# Altium PCB pogo_socket_6port.PcbDoc
Units mil, origin at the board's own origin, x right, y up, seen from the top; angles counter-clockwise.
Board outline 1442 x 1166 mil, 4 copper layers (Top Layer, Mid-Layer 1, Mid-Layer 2, Bottom Layer), stack 43.512 mil thick; 6 components, 7 nets, 49 pads, 342 vias.
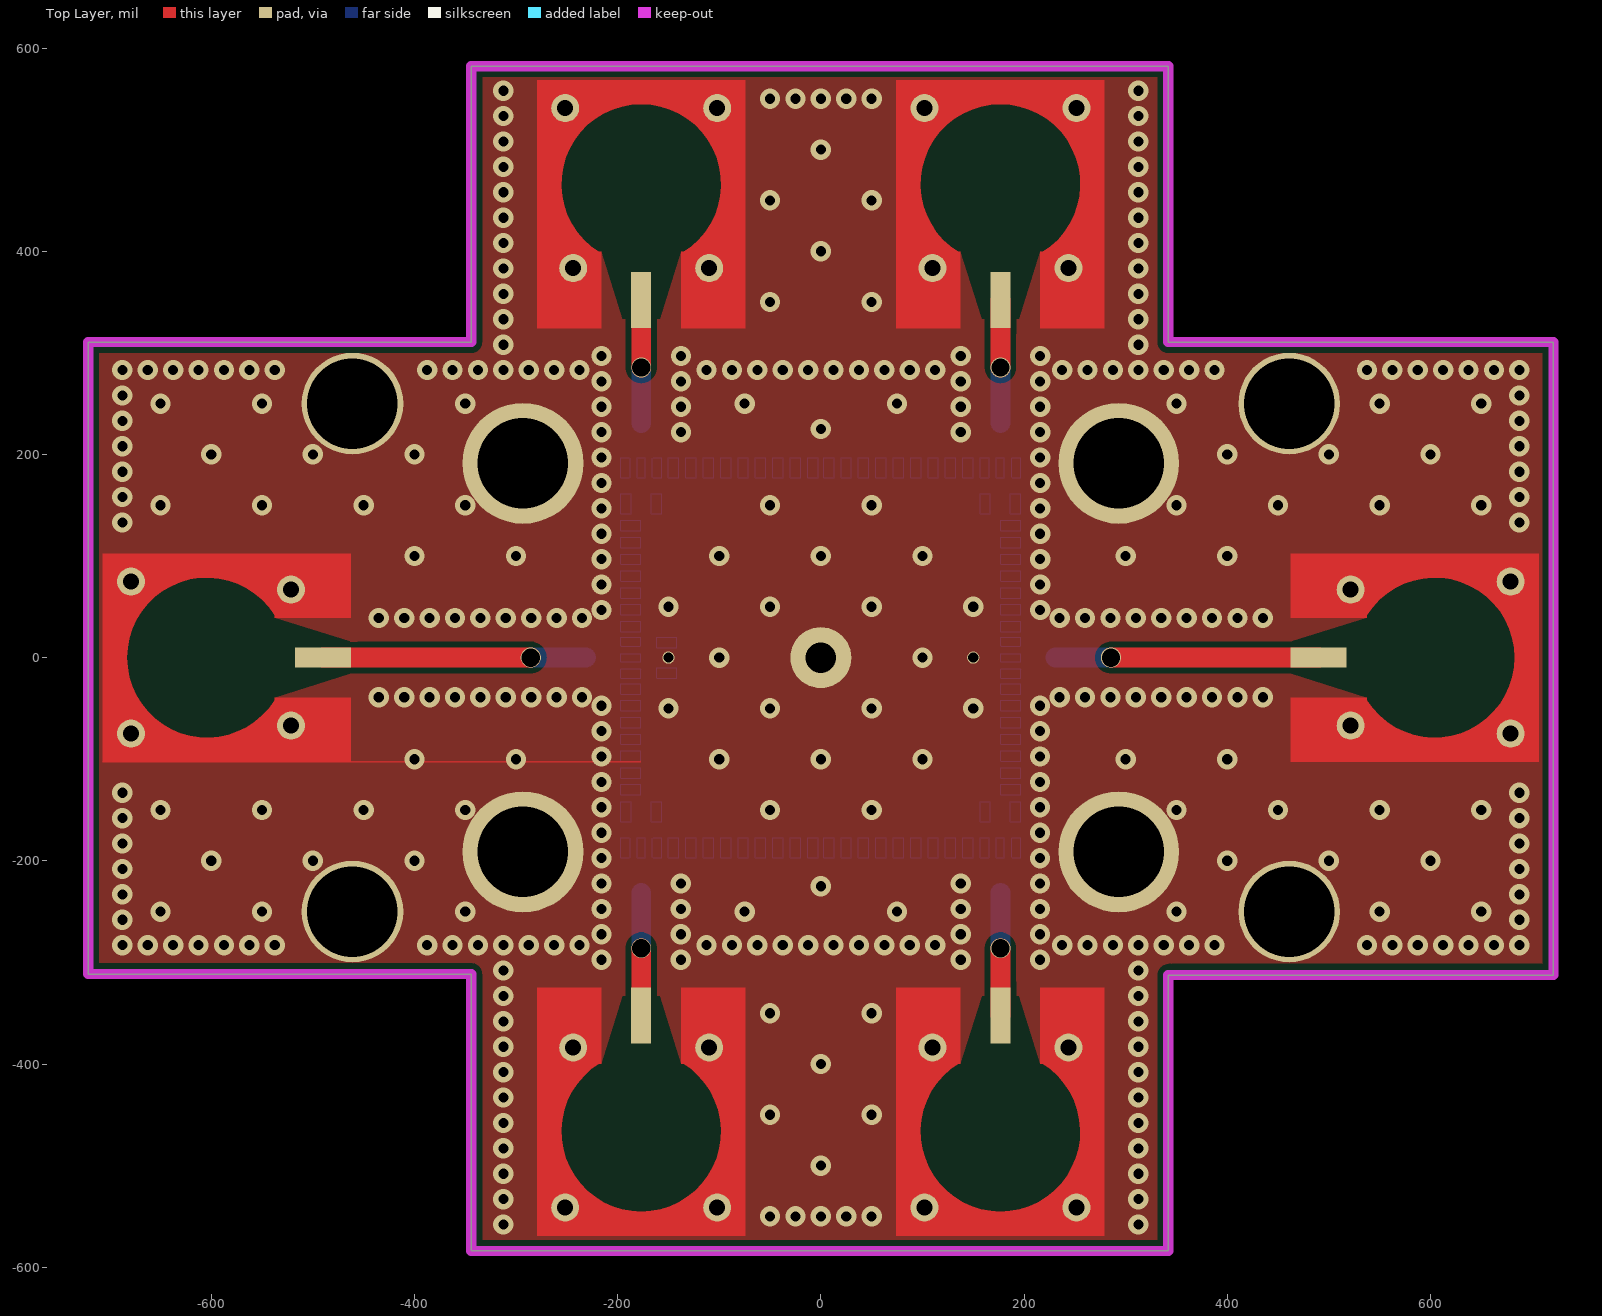
[diagram p0: Top Layer view]
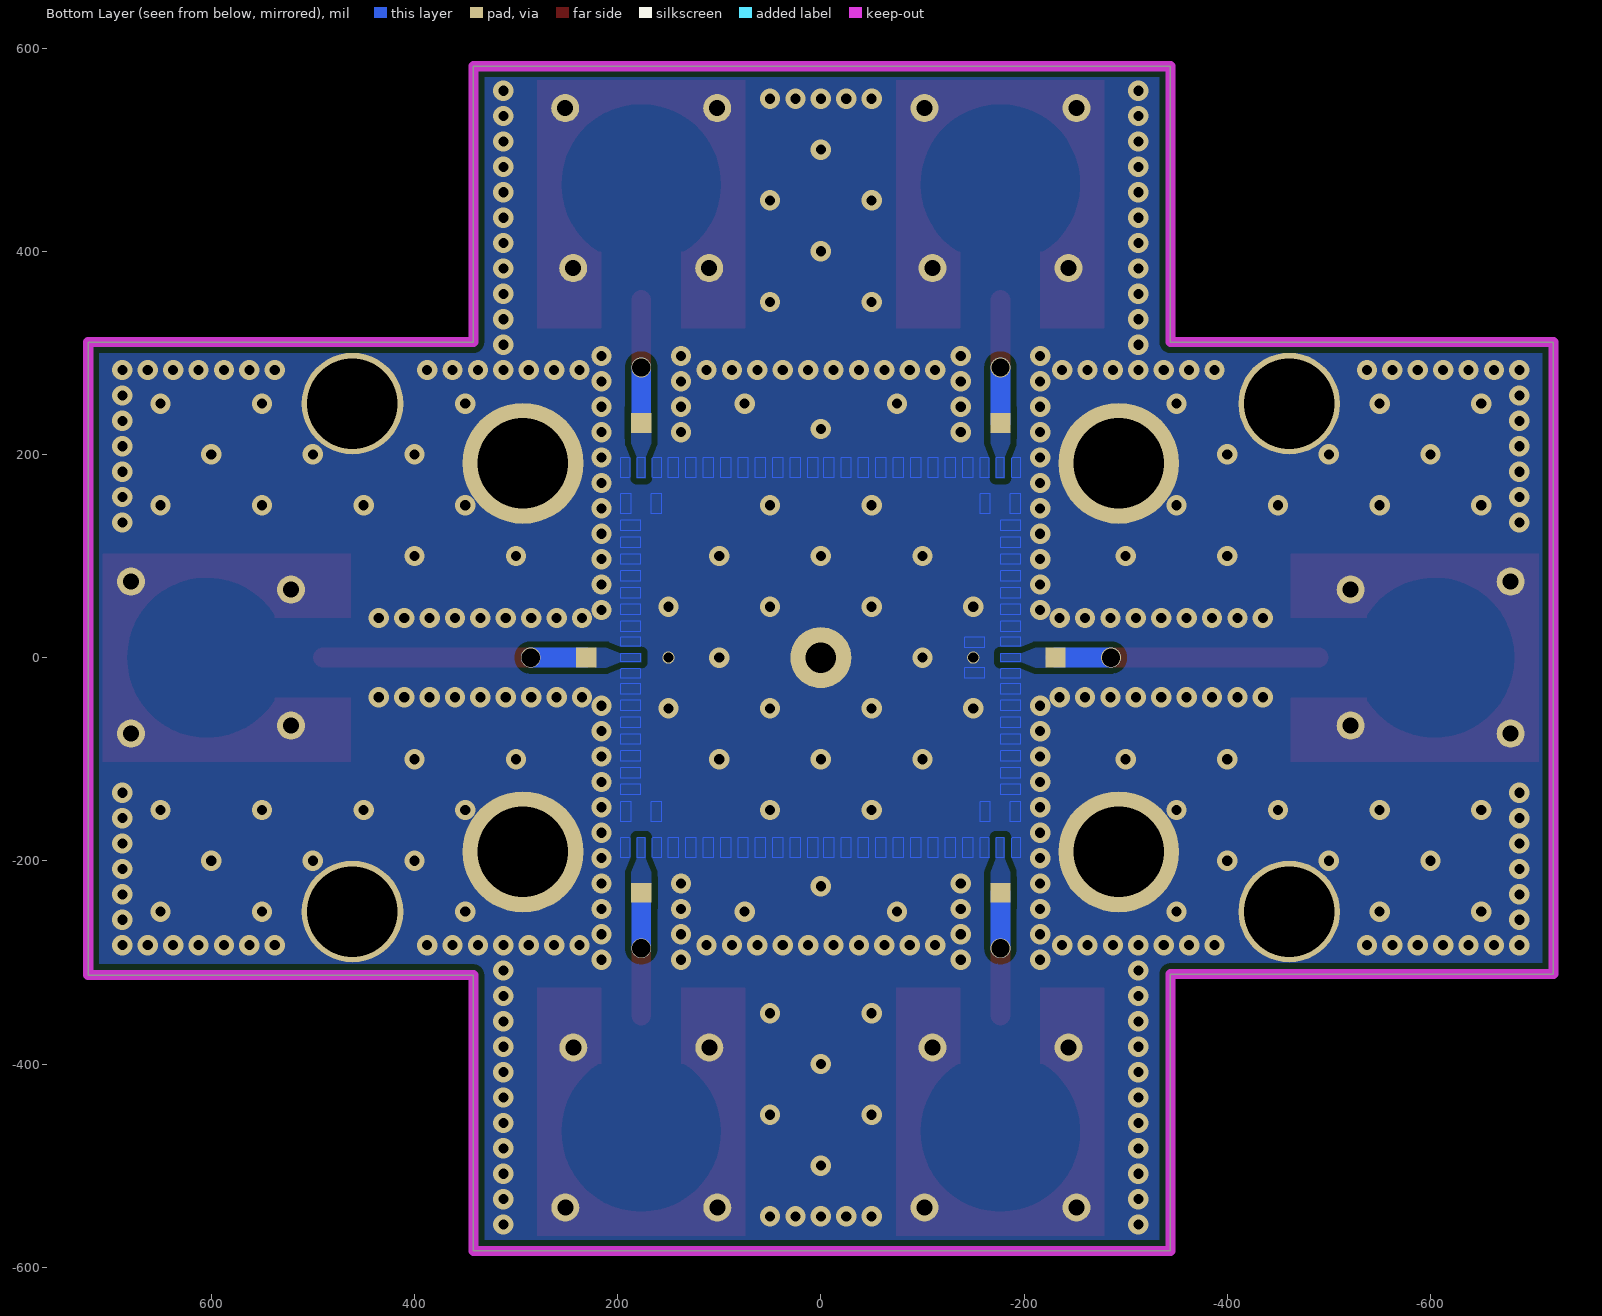
[diagram p1: Bottom Layer view, seen from below]
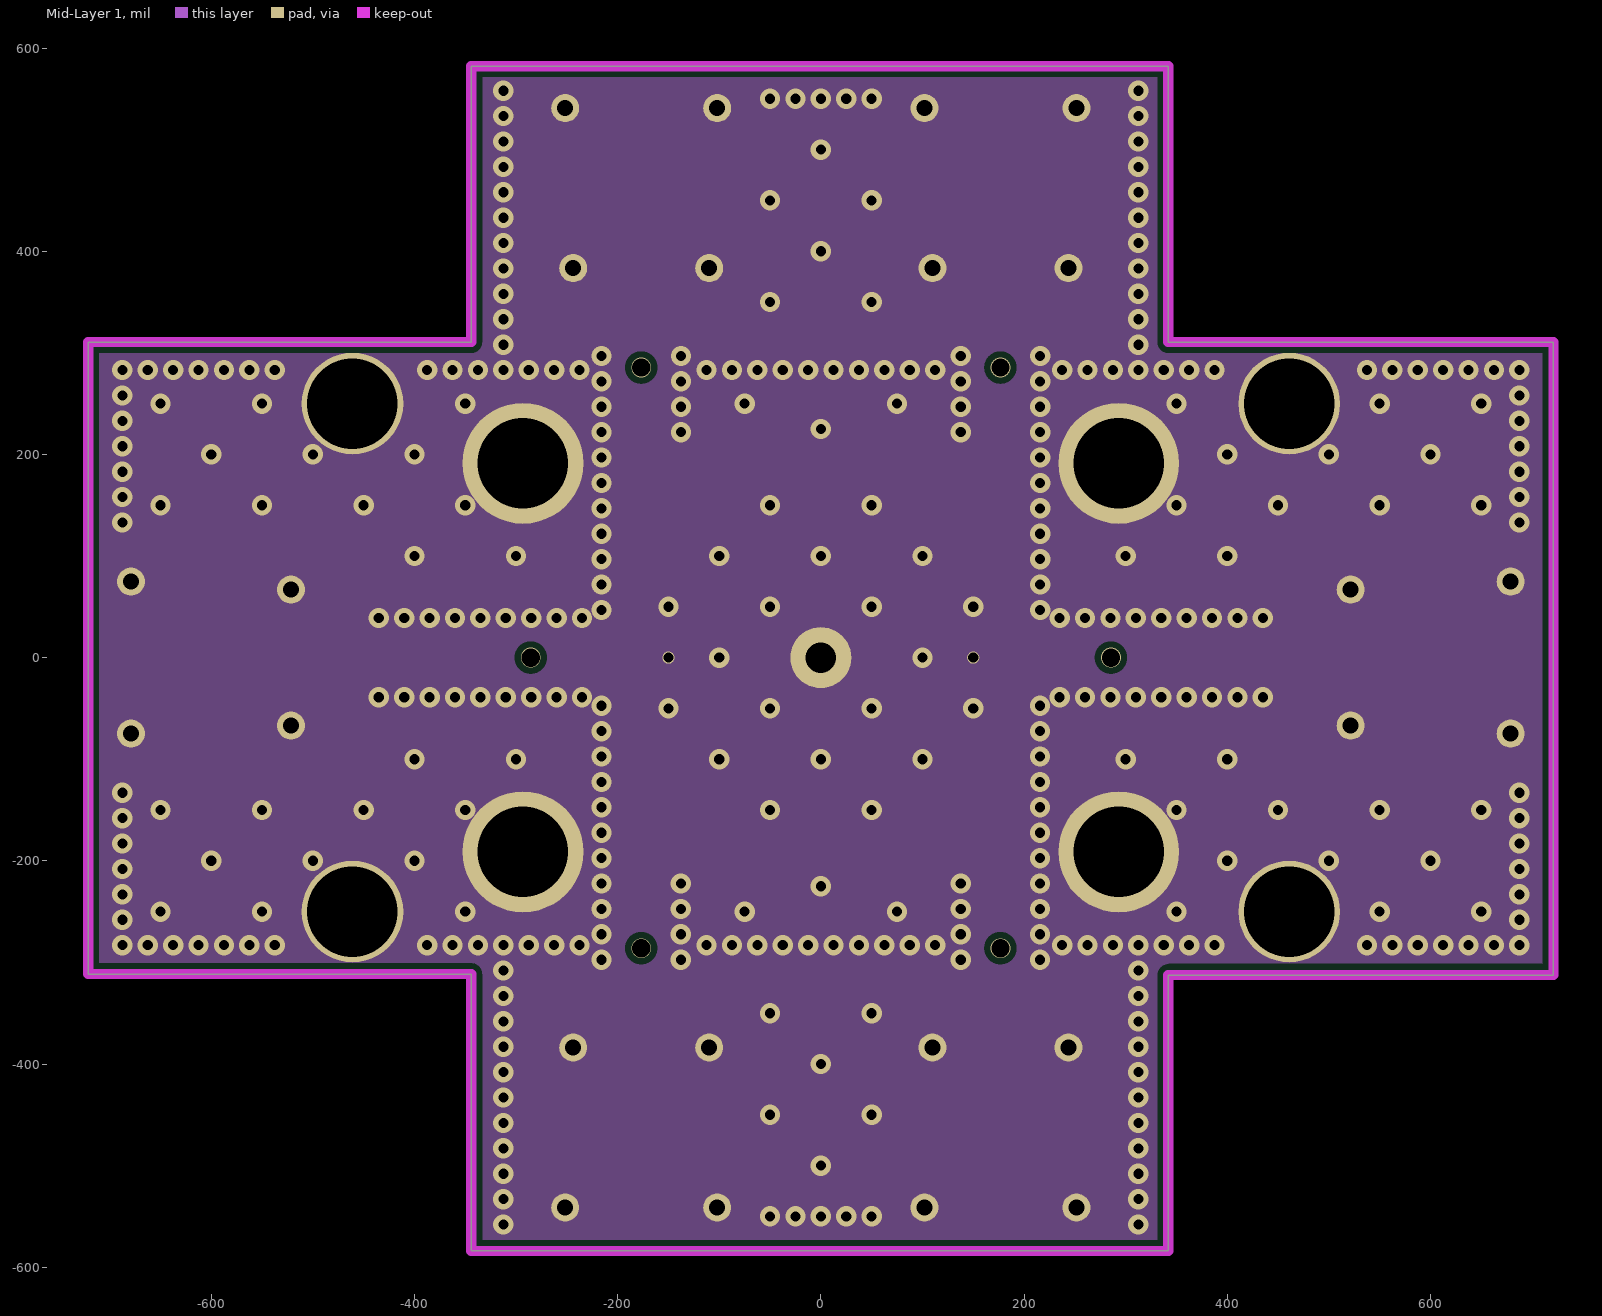
[diagram p2: Mid-Layer 1]
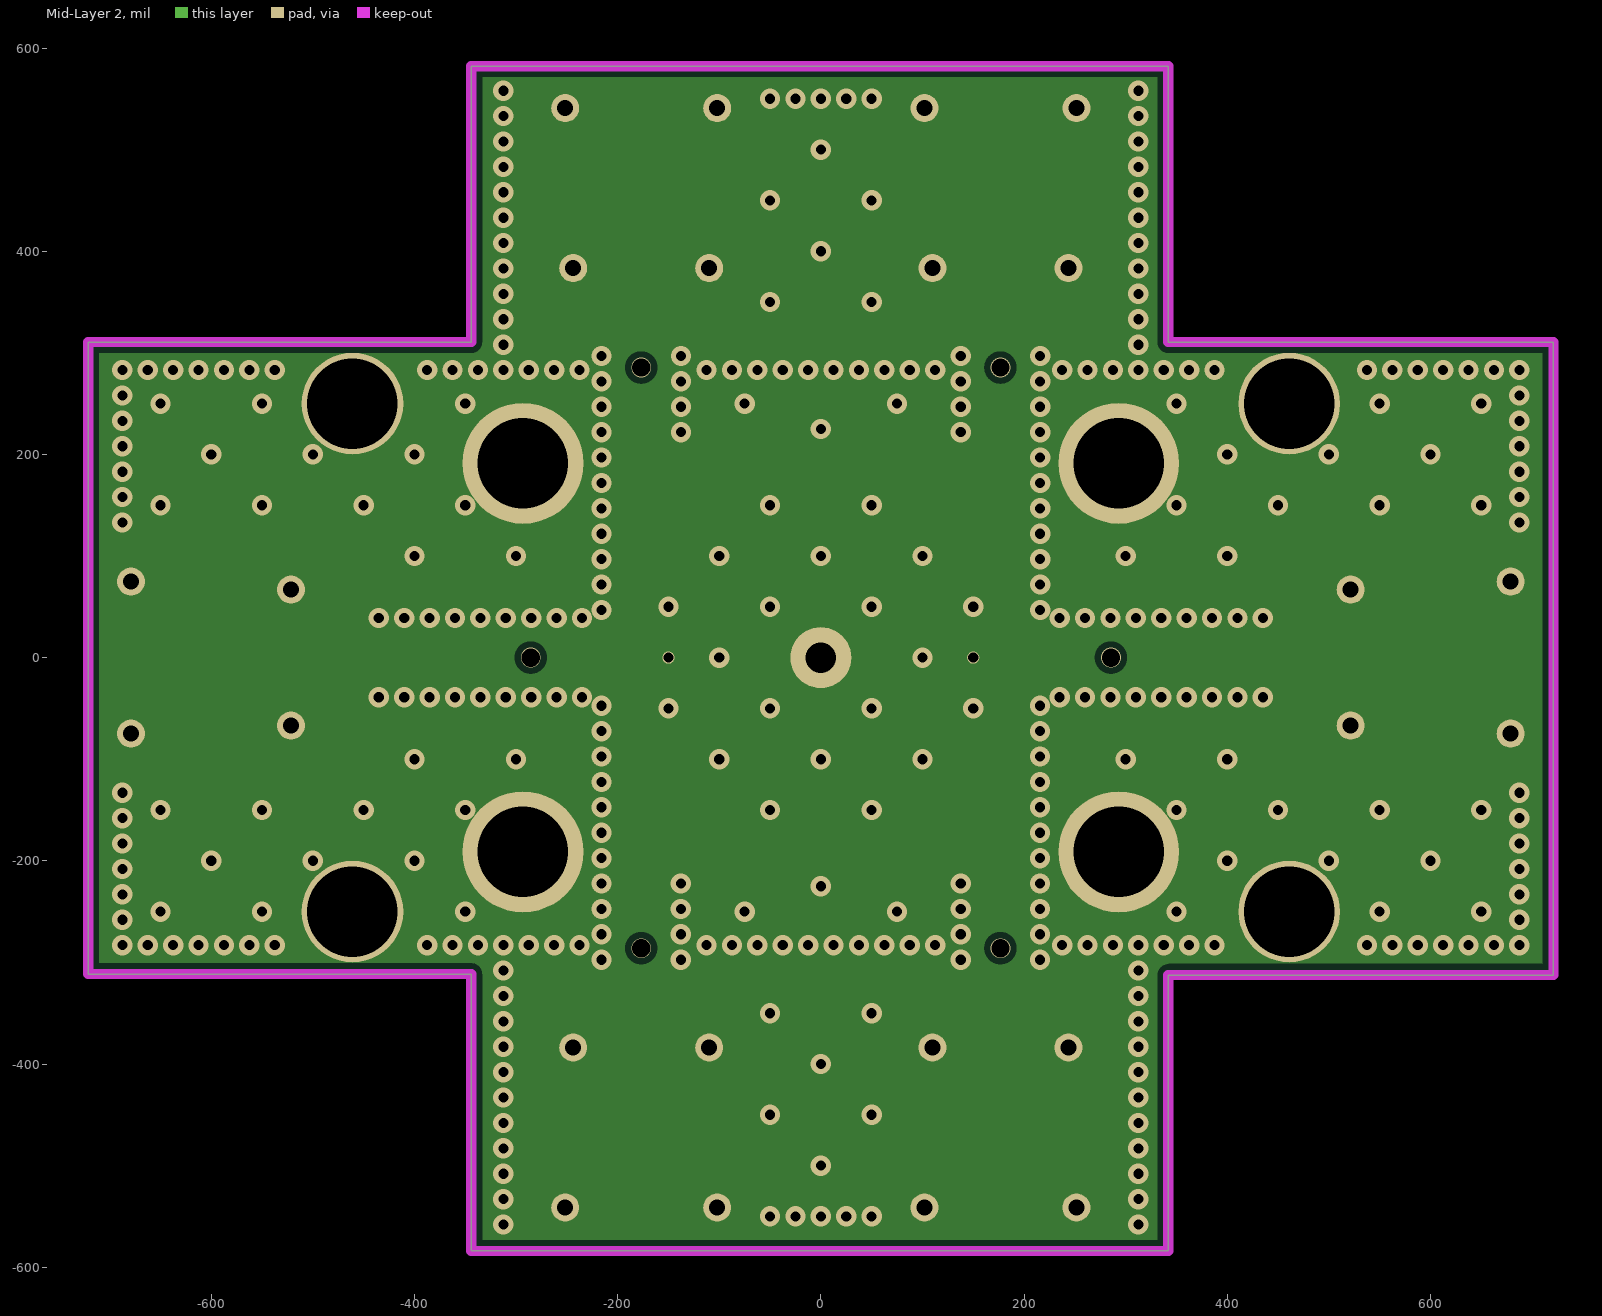
[diagram p3: Mid-Layer 2]
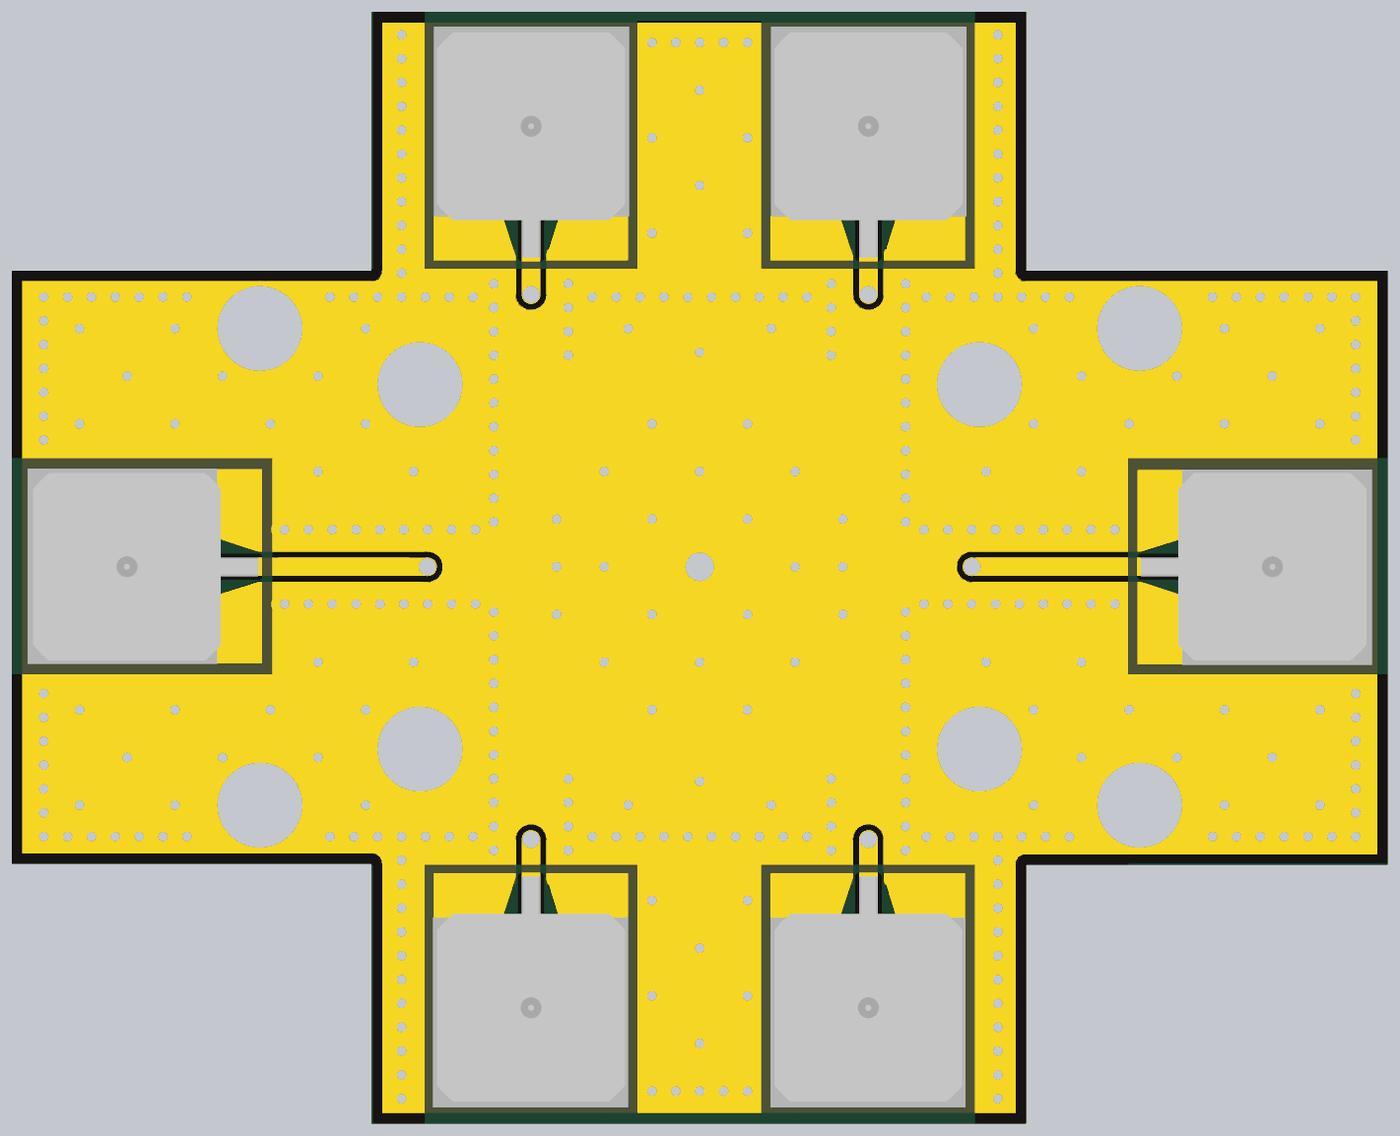
[diagram p4: 3D render of the assembled board from above, using the file's embedded part models]

## Layer stack, top to bottom
Top Solder: solder mask 1, SM-001, Dk 4
Top Layer: signal copper 1.378
Core1: dielectric 10, RO4350B, Dk 3.48
Mid-Layer 1: signal copper 1.378
Dielectric 1: prepreg 7, Composite dielectric, Dk 4.24
Dielectric 2: prepreg 4, Composite dielectric, Dk 4.24
Dielectric 3: prepreg 7, Composite dielectric, Dk 4.24
Mid-Layer 2: signal copper 1.378
Core2: dielectric 10, RO-4350B, Dk 3.48
Bottom Layer: signal copper 1.378
Bottom Solder: solder mask 1, SM-001, Dk 4

## Board outline
-721,-311.5 -721,309.12 -721,310.5 -344,310.5 -344,582 342,582 342,310.5 721,310.5 721,-312.5 342,-312.5 342,-584 -344,-584 -344,-311.5

## Design rules (kind name [scope] priority, off if disabled: settings)
Clearance "Stitching GND" [IsStitchingVia and InNet('GND') vs (IsVia and (Not IsStitchingVia)) Or IsPad] p1: gap=5 ignorepadtopadclearanceinfootprint=FALSE
Clearance Clearance_1 [All] p2: gap=10 ignorepadtopadclearanceinfootprint=FALSE except(0: Poly-Region; 3.74: Track-Region SMDPad-Region Region-Region; 3.94: Track-Track Track-SMDPad; 4: Track-Fill; 5: Track-THPad; 6: Arc-Poly Track-Poly SMDPad-Poly THPad-Poly Via-Poly Fill-Poly Poly-Poly Poly-Text Poly-Hole; 8: Arc-SMDPad; 9: SMDPad-SMDPad)
PolygonConnect [All] p1: connectstyle=Direct reliefconductorwidth=10 reliefentries=4 polygonreliefangle="90 Angle" airgapwidth=10
RoutingVias [All] p1: holewidth=15 width=25 viastyle="Through Hole" minholewidth=5 minwidth=10 maxholewidth=28 maxwidth=50
SolderMaskExpansion [All] p1: expansion=4 istentingtop=FALSE
Width [All] p1 off: maxlimit=21.65 minlimit=3.94 preferedwidth=10 toplayer_prefwidth=3.94 midlayer1_minwidth=10 midlayer1_maxwidth=10 midlayer2_minwidth=10 midlayer2_maxwidth=10 bottomlayer_minwidth=10 bottomlayer_maxwidth=10 minimp=50.000000 maximp=50.000000 favimp=50.000000
Width cpw-Z-1 [All] p2 off: maxlimit=19.68 minlimit=6.87 preferedwidth=10 toplayer_minwidth=12.7 toplayer_prefwidth=15.98 impedanceprofiledriven=TRUE impedanceprofileid={FF6547F1-1ACB-4B88-A69B-03F59FE56022} impedanceprofilevalue=50.000000 minimp=50.000000 maximp=50.000000 favimp=50.000000
30 further rules are at their usual default settings.

## Components (designator, comment, footprint, x,y, rotation, side; value= is the part's Value field where it differs from the comment)
J8 "SMP-straight-19S10H-40ML5" rosenberger-19S141-40ML5 176.77,466.02 r0 top
J8 "SMP-straight-19S10H-40ML5" rosenberger-19S141-40ML5 176.75,-466.49 r180 top
J8 "SMP-straight-19S10H-40ML5" rosenberger-19S141-40ML5 -176.8,-466.49 r180 top
J8 "SMP-straight-19S10H-40ML5" rosenberger-19S141-40ML5 -176.77,466.02 r0 top
J8 "SMP-straight-19S10H-40ML5" rosenberger-19S141-40ML5 -604.2,0 r90 top
J8 "SMP-straight-19S10H-40ML5" rosenberger-19S141-40ML5 604.2,0 r270 top

## Footprints (in the part's own frame and the unit in brackets; to place one, negate y for a bottom-side part, rotate by r counter-clockwise, add the part's x,y. Pads: shape width x height; smd on the part's side, far side on the other; paste and mask are expansions set on the pad)
rosenberger-19S141-40ML5 [mm]
  rect 0.5x1.4 smd: 1(0,-2.9)
  round 0.7 hole 0.4 mask+0: gnd(-1.9,1.9) gnd(-1.7,-2.1) gnd(1.7,-2.1) gnd(1.9,1.9)
  Top Layer region: -2.6,-3.6 -2.6,2.6 2.6,2.6 2.6,-3.6 1,-3.6 1,-1.696 1.06,-1.696 1.759,-0.951 2,0.042 1.718,1.024 0.988,1.739 0,2 -0.988,1.739 -1.718,1.024 -2,0.042 -1.759,-0.951 -1.06,-1.696 -1.06,-1.696 -1,-1.696 -1,-3.6
  body extent -2.5,-3.6 2.5,2.4, height 4.1

## Part data
J8 J8 J8 J8 J8 J8: "LIMITED DETENT SMP Connector Plug, Male Pin 50Ohm Surface Mount Solder", Package=None, Supplier Part Number 1=1868-1125-1-ND, Availability="In Stock", Check_prices=https://www.snapeda.com/parts/853050232/Molex/view-part/?ref=eda, MF=Molex, MP=853050232, Price=None, Purchase-URL=https://pricing.snapeda.com/search/part/853050232/?ref=eda, SnapEDA_Link=https://www.snapeda.com/parts/853050232/Molex/view-part/?ref=snap, Supplier 1=Digikey

## Free pads (board coordinates)
  oval 20x19.5 smd paste-100 mask-100: 1(-285.51,0) 1(285.51,0)
  rect 20x19.5 smd far side paste-100 mask-100: 1(-231,0) 1(-176.8,-231.47) 1(-176.77,231) 1(176.75,-231.47) 1(176.77,231) 1(231,0)
  round 119 hole 89: 2(293.2,-191.2) 3(293.2,191.2) 4(-293.2,191.2) 5(-293.2,-191.2)
  round 100 hole 89: 5(-461,-250) 5(-461,250) 5(461,-250) 5(461,250)
  round 60 hole 30: 6(0,0)
  round 12 hole 10: 7(-150,0) 7(150,0)

## Via types
v1: diameter 20, hole 10, Top Layer to Bottom Layer, 336 vias
v2: diameter 19.5, hole 18, Top Layer to Bottom Layer, 6 vias

## Nets (pads, with @x,y where several pads share a name; then routed paths per layer and width w, separated by ;. In a path a pad name is that pad's centre, name@x,y a point inside that pad or via, vN(x,y) a via of type N, cw(c..) or ccw(c..) an arc to the next point about the centre after c; other vN are vias at no path point)
GND: J8.gnd pad.2 pad.3 pad.4 pad.5 pad.6 pad.7 | length 5110.4
  Bottom Layer w1: -196.85,-196.85 -188.36,-196.85 -187.77,-196.26 -187.77,-177.75 -188.36,-177.17 -196.85,-177.17 -196.85,-196.85 ; -196.85,-161.42 -186.61,-161.42 -186.61,-141.73 -196.85,-141.73 -196.85,-161.42 ; -196.85,-135.04 -196.85,-124.8 -177.17,-124.8 -177.17,-135.04 -196.85,-135.04 ; -196.85,-118.5 -196.85,-108.27 -177.17,-108.27 -177.17,-118.5 -196.85,-118.5 ; -196.85,-101.97 -196.85,-91.73 -177.17,-91.73 -177.17,-101.97 -196.85,-101.97 ; -196.85,-85.43 -196.85,-75.2 -177.17,-75.2 -177.17,-85.43 -196.85,-85.43 ; -196.85,-68.9 -196.85,-58.66 -177.17,-58.66 -177.17,-68.9 -196.85,-68.9 ; -196.85,-52.36 -196.85,-42.13 -177.17,-42.13 -177.17,-52.36 -196.85,-52.36 ; -196.85,-35.83 -196.85,-25.59 -177.17,-25.59 -177.17,-35.83 -196.85,-35.83 ; -196.85,-20.08 -196.85,-11.59 -196.26,-11 -177.75,-11 -177.17,-11.59 -177.17,-20.08 -196.85,-20.08 ; -196.85,11.59 -196.85,20.08 -177.17,20.08 -177.17,11.59 -177.75,11 -196.26,11 -196.85,11.59 ; -196.85,25.59 -196.85,35.83 -177.17,35.83 -177.17,25.59 -196.85,25.59 ; -196.85,42.13 -196.85,52.36 -177.17,52.36 -177.17,42.13 -196.85,42.13 ; -196.85,58.66 -196.85,68.9 -177.17,68.9 -177.17,58.66 -196.85,58.66 ; -196.85,75.2 -196.85,85.43 -177.17,85.43 -177.17,75.2 -196.85,75.2 ; -196.85,91.73 -196.85,101.97 -177.17,101.97 -177.17,91.73 -196.85,91.73 ; -196.85,108.27 -196.85,118.5 -177.17,118.5 -177.17,108.27 -196.85,108.27 ; -196.85,124.8 -196.85,135.04 -177.17,135.04 -177.17,124.8 -196.85,124.8 ; -196.85,141.73 -186.61,141.73 -186.61,161.42 -196.85,161.42 -196.85,141.73 ; -196.85,177.17 -188.36,177.17 -187.77,177.75 -187.77,196.26 -188.36,196.85 -196.85,196.85 -196.85,177.17 ; -166.93,-161.42 -156.69,-161.42 -156.69,-141.73 -166.93,-141.73 -166.93,-161.42 ; -166.93,141.73 -156.69,141.73 -156.69,161.42 -166.93,161.42 -166.93,141.73 ; -165.77,-196.26 -165.19,-196.85 -156.69,-196.85 -156.69,-177.17 -165.19,-177.17 -165.77,-177.75 -165.77,-196.26 ; -165.77,177.75 -165.77,196.26 -165.19,196.85 -156.69,196.85 -156.69,177.17 -165.19,177.17 -165.77,177.75 ; -161.42,-20.08 -141.73,-20.08 -141.73,-9.84 -161.42,-9.84 -161.42,-20.08 ; -161.42,9.84 -141.73,9.84 -141.73,20.08 -161.42,20.08 -161.42,9.84 ; -150,-196.85 -139.76,-196.85 -139.76,-177.17 -150,-177.17 -150,-196.85 ; -150,177.17 -150,196.85 -139.76,196.85 -139.76,177.17 -150,177.17 ; -132.87,-196.85 -122.64,-196.85 -122.64,-177.17 -132.87,-177.17 -132.87,-196.85 ; -132.87,177.17 -132.87,196.85 -122.64,196.85 -122.64,177.17 -132.87,177.17 ; -115.75,-196.85 -105.51,-196.85 -105.51,-177.17 -115.75,-177.17 -115.75,-196.85 ; -115.75,177.17 -115.75,196.85 -105.51,196.85 -105.51,177.17 -115.75,177.17 ; -98.62,-196.85 -98.62,-177.17 -88.39,-177.17 -88.39,-196.85 -98.62,-196.85 ; -98.62,177.17 -98.62,196.85 -88.39,196.85 -88.39,177.17 -98.62,177.17 ; -81.5,-196.85 -81.5,-177.17 -71.26,-177.17 -71.26,-196.85 -81.5,-196.85 ; -81.5,177.17 -81.5,196.85 -71.26,196.85 -71.26,177.17 -81.5,177.17 ; -64.37,-196.85 -64.37,-177.17 -54.13,-177.17 -54.13,-196.85 -64.37,-196.85 ; -64.37,177.17 -64.37,196.85 -54.13,196.85 -54.13,177.17 -64.37,177.17 ; -47.24,-196.85 -47.24,-177.17 -37.01,-177.17 -37.01,-196.85 -47.24,-196.85 ; -47.24,177.17 -47.24,196.85 -37.01,196.85 -37.01,177.17 -47.24,177.17 ; -30.12,-196.85 -30.12,-177.17 -19.88,-177.17 -19.88,-196.85 -30.12,-196.85 ; -30.12,177.17 -19.88,177.17 -19.88,196.85 -30.12,196.85 -30.12,177.17 ; -12.99,-196.85 -12.99,-177.17 -2.76,-177.17 -2.76,-196.85 -12.99,-196.85 ; -12.99,177.17 -12.99,196.85 -2.76,196.85 -2.76,177.17 -12.99,177.17 ; 2.76,-196.85 2.76,-177.17 12.99,-177.17 12.99,-196.85 2.76,-196.85 ; 2.76,177.17 2.76,196.85 12.99,196.85 12.99,177.17 2.76,177.17 ; 19.88,-196.85 19.88,-177.17 30.12,-177.17 30.12,-196.85 19.88,-196.85 ; 19.88,177.17 19.88,196.85 30.12,196.85 30.12,177.17 19.88,177.17 ; 37.01,-196.85 37.01,-177.17 47.24,-177.17 47.24,-196.85 37.01,-196.85 ; 37.01,177.17 37.01,196.85 47.24,196.85 47.24,177.17 37.01,177.17 ; 54.13,-196.85 54.13,-177.17 64.37,-177.17 64.37,-196.85 54.13,-196.85 ; 54.13,177.17 54.13,196.85 64.37,196.85 64.37,177.17 54.13,177.17 ; 71.26,-196.85 71.26,-177.17 81.5,-177.17 81.5,-196.85 71.26,-196.85 ; 71.26,177.17 71.26,196.85 81.5,196.85 81.5,177.17 71.26,177.17 ; 88.39,-196.85 88.39,-177.17 98.62,-177.17 98.62,-196.85 88.39,-196.85 ; 88.39,177.17 88.39,196.85 98.62,196.85 98.62,177.17 88.39,177.17 ; 105.51,-196.85 105.51,-177.17 115.75,-177.17 115.75,-196.85 105.51,-196.85 ; 105.51,177.17 105.51,196.85 115.75,196.85 115.75,177.17 105.51,177.17 ; 122.64,-196.85 122.64,-177.17 132.87,-177.17 132.87,-196.85 122.64,-196.85 ; 122.64,177.17 122.64,196.85 132.87,196.85 132.87,177.17 122.64,177.17 ; 139.76,-196.85 139.76,-177.17 150,-177.17 150,-196.85 139.76,-196.85 ; 139.76,177.17 139.76,196.85 150,196.85 150,177.17 139.76,177.17 ; 156.69,-196.85 156.69,-177.17 165.19,-177.17 165.77,-177.75 165.77,-196.26 165.19,-196.85 156.69,-196.85 ; 156.69,-161.42 166.93,-161.42 166.93,-141.73 156.69,-141.73 156.69,-161.42 ; 156.69,141.73 156.69,161.42 166.93,161.42 166.93,141.73 156.69,141.73 ; 156.69,177.17 156.69,196.85 165.19,196.85 165.77,196.26 165.77,177.75 165.19,177.17 156.69,177.17 ; 177.17,-135.04 177.17,-124.8 196.85,-124.8 196.85,-135.04 177.17,-135.04 ; 177.17,-118.5 177.17,-108.27 196.85,-108.27 196.85,-118.5 177.17,-118.5 ; 177.17,-101.97 177.17,-91.73 196.85,-91.73 196.85,-101.97 177.17,-101.97 ; 177.17,-85.43 177.17,-75.2 196.85,-75.2 196.85,-85.43 177.17,-85.43 ; 177.17,-68.9 177.17,-58.66 196.85,-58.66 196.85,-68.9 177.17,-68.9 ; 177.17,-52.36 177.17,-42.13 196.85,-42.13 196.85,-52.36 177.17,-52.36 ; 177.17,-35.83 177.17,-25.59 196.85,-25.59 196.85,-35.83 177.17,-35.83 ; 177.17,-20.08 177.17,-11.59 177.75,-11 196.26,-11 196.85,-11.59 196.85,-20.08 177.17,-20.08 ; 177.17,11.59 177.17,20.08 196.85,20.08 196.85,11.59 196.26,11 177.75,11 177.17,11.59 ; 177.17,25.59 177.17,35.83 196.85,35.83 196.85,25.59 177.17,25.59 ; 177.17,42.13 177.17,52.36 196.85,52.36 196.85,42.13 177.17,42.13 ; 177.17,58.66 177.17,68.9 196.85,68.9 196.85,58.66 177.17,58.66 ; 177.17,75.2 177.17,85.43 196.85,85.43 196.85,75.2 177.17,75.2 ; 177.17,91.73 177.17,101.97 196.85,101.97 196.85,91.73 177.17,91.73 ; 177.17,108.27 177.17,118.5 196.85,118.5 196.85,108.27 177.17,108.27 ; 177.17,124.8 177.17,135.04 196.85,135.04 196.85,124.8 177.17,124.8 ; 186.61,-161.42 186.61,-141.73 196.85,-141.73 196.85,-161.42 186.61,-161.42 ; 186.61,141.73 186.61,161.42 196.85,161.42 196.85,141.73 186.61,141.73 ; 187.77,-196.26 188.36,-196.85 196.85,-196.85 196.85,-177.17 188.36,-177.17 187.77,-177.75 187.77,-196.26 ; 187.77,177.75 188.36,177.17 196.85,177.17 196.85,196.85 188.36,196.85 187.77,196.26 187.77,177.75
  other v1: -312.5,-558 312.5,-558 -50,-550 -25,-550 0,-550 25,-550 50,-550 -312.5,-533 312.5,-533 -312.5,-508 312.5,-508 0,-500 -312.5,-483 312.5,-483 -312.5,-458 312.5,-458 -50,-450 50,-450 -312.5,-433 312.5,-433 -312.5,-408 312.5,-408 0,-400 -312.5,-383 312.5,-383 -312.5,-358 312.5,-358 -50,-350 50,-350 -312.5,-333 312.5,-333 -312.5,-308 312.5,-308 -215.85,-297.35 -137.74,-297.35 137.69,-297.35 215.8,-297.35 -687.5,-283 -662.5,-283 -637.5,-283 -612.5,-283 -587.5,-283 -562.5,-283 -537.5,-283 -387.5,-283 -362.5,-283 -337.5,-283 -312.5,-283 -287.5,-283 -262.5,-283 -237.5,-283 -112.5,-283 -87.5,-283 -62.5,-283 -37.5,-283 -12.5,-283 12.5,-283 37.5,-283 62.5,-283 87.5,-283 112.5,-283 237.5,-283 262.5,-283 287.5,-283 312.5,-283 337.5,-283 362.5,-283 387.5,-283 537.5,-283 562.5,-283 587.5,-283 612.5,-283 637.5,-283 662.5,-283 687.5,-283 -215.85,-272.35 -137.74,-272.35 137.69,-272.35 215.8,-272.35 -687.5,-258 687.5,-258 -650,-250 -550,-250 -350,-250 -75,-250 75,-250 350,-250 550,-250 650,-250 -215.85,-247.35 -137.74,-247.35 137.69,-247.35 215.8,-247.35 -687.5,-233 687.5,-233 0,-225 -215.85,-222.35 -137.74,-222.35 137.69,-222.35 215.8,-222.35 -687.5,-208 687.5,-208 -600,-200 -500,-200 -400,-200 400,-200 500,-200 600,-200 -215.85,-197.35 215.8,-197.35 -687.5,-183 687.5,-183 -215.85,-172.35 215.8,-172.35 -687.5,-158 687.5,-158 -650,-150 -550,-150 -450,-150 -350,-150 -50,-150 50,-150 350,-150 450,-150 550,-150 650,-150 -215.85,-147.35 215.8,-147.35 -687.5,-133 687.5,-133 -215.85,-122.35 215.8,-122.35 -400,-100 -300,-100 -100,-100 0,-100 100,-100 300,-100 400,-100 -215.85,-97.35 215.8,-97.35 -215.85,-72.35 215.8,-72.35 -150,-50 -50,-50 50,-50 150,-50 -215.85,-47.35 215.8,-47.35 -435.06,-39.05 -410.06,-39.05 -385.06,-39.05 -360.06,-39.05 -335.06,-39.05 -310.06,-39.05 -285.06,-39.05 -260.06,-39.05 -235.06,-39.05 235.06,-39.06 260.06,-39.06 285.06,-39.06 310.06,-39.06 335.06,-39.06 360.06,-39.06 385.06,-39.06 410.06,-39.06 435.06,-39.06 -100,0 100,0 -435.06,39.06 -410.06,39.06 -385.06,39.06 -360.06,39.06 -335.06,39.06 -310.06,39.06 -285.06,39.06 -260.06,39.06 -235.06,39.06 235.06,39.05 260.06,39.05 285.06,39.05 310.06,39.05 335.06,39.05 360.06,39.05 385.06,39.05 410.06,39.05 435.06,39.05 -215.83,46.89 215.83,46.89 -150,50 -50,50 50,50 150,50 -215.83,71.89 215.83,71.89 -215.83,96.89 215.83,96.89 -400,100 -300,100 -100,100 0,100 100,100 300,100 400,100 -215.83,121.89 215.83,121.89 -687.5,133 687.5,133 -215.83,146.89 215.83,146.89 -650,150 -550,150 -450,150 -350,150 -50,150 50,150 350,150 450,150 550,150 650,150 -687.5,158 687.5,158 -215.83,171.89 215.83,171.89 -687.5,183 687.5,183 -215.83,196.89 215.83,196.89 -600,200 -500,200 -400,200 400,200 500,200 600,200 -687.5,208 687.5,208 -215.83,221.89 -137.72,221.89 137.72,221.89 215.83,221.89 0,225 -687.5,233 687.5,233 -215.83,246.89 -137.72,246.89 137.72,246.89 215.83,246.89 -650,250 -550,250 -350,250 -75,250 75,250 350,250 550,250 650,250 -687.5,258 687.5,258 -215.83,271.89 -137.72,271.89 137.72,271.89 215.83,271.89 -687.5,283 -662.5,283 -637.5,283 -612.5,283 -587.5,283 -562.5,283 -537.5,283 -387.5,283 -362.5,283 -337.5,283 -312.5,283 -287.5,283 -262.5,283 -237.5,283 -112.5,283 -87.5,283 -62.5,283 -37.5,283 -12.5,283 12.5,283 37.5,283 62.5,283 87.5,283 112.5,283 237.5,283 262.5,283 287.5,283 312.5,283 337.5,283 362.5,283 387.5,283 537.5,283 562.5,283 587.5,283 612.5,283 637.5,283 662.5,283 687.5,283 -215.83,296.89 -137.72,296.89 137.72,296.89 215.83,296.89 -312.5,308 312.5,308 -312.5,333 312.5,333 -50,350 50,350 -312.5,358 312.5,358 -312.5,383 312.5,383 0,400 -312.5,408 312.5,408 -312.5,433 312.5,433 -50,450 50,450 -312.5,458 312.5,458 -312.5,483 312.5,483 0,500 -312.5,508 312.5,508 -312.5,533 312.5,533 -50,550 -25,550 0,550 25,550 50,550 -312.5,558 312.5,558
sig_1: J8.1@-490.02,0 pad.1@-231,0 pad.1@-285.51,0 | length 314.1
  Top Layer w19.5: J8.1@-490.02,0 v2(-285.51,0)
  Bottom Layer w1: -196.85,-3.94 -196.85,3.94 -177.17,3.94 -177.17,-3.94 -196.85,-3.94
  Bottom Layer w19.5: v2(-285.51,0) pad.1@-231,0
sig_2: J8.1@490.02,0 pad.1@231,0 pad.1@285.51,0 | length 314.1
  Top Layer w19.5: v2(285.51,0) J8.1@490.02,0
  Bottom Layer w1: 177.17,-3.94 196.85,-3.94 196.85,3.94 177.17,3.94 177.17,-3.94
  Bottom Layer w19.5: pad.1@231,0 v2(285.51,0)
sig_3: J8.1@-176.77,351.85 pad.1@-176.77,231 | length 176
  Top Layer w19.5: v2(-176.77,285.51) J8.1@-176.77,351.85
  Bottom Layer w1: -180.71,177.17 -180.71,196.85 -172.83,196.85 -172.83,177.17 -180.71,177.17
  Bottom Layer w19.5: pad.1@-176.77,231 v2(-176.77,285.51)
sig_4: J8.1@176.77,351.85 pad.1@176.77,231 | length 176
  Top Layer w19.5: v2(176.77,285.51) J8.1@176.77,351.85
  Bottom Layer w1: 172.83,177.17 172.83,196.85 180.71,196.85 180.71,177.17 172.83,177.17
  Bottom Layer w19.5: pad.1@176.77,231 v2(176.77,285.51)
sig_5: J8.1@-176.8,-352.32 pad.1@-176.8,-231.47 | length 176
  Top Layer w19.5: J8.1@-176.8,-352.32 v2(-176.8,-285.98)
  Bottom Layer w1: -180.71,-196.85 -172.83,-196.85 -172.83,-177.17 -180.71,-177.17 -180.71,-196.85
  Bottom Layer w19.5: v2(-176.8,-285.98) pad.1@-176.8,-231.47
sig_6: J8.1@176.75,-352.32 pad.1@176.75,-231.47 | length 176
  Top Layer w19.5: J8.1@176.75,-352.32 v2(176.75,-285.98)
  Bottom Layer w1: 172.83,-196.85 172.83,-177.17 180.71,-177.17 180.71,-196.85 172.83,-196.85
  Bottom Layer w19.5: v2(176.75,-285.98) pad.1@176.75,-231.47

## Polygon pours and split planes (outlines as drawn)
no net on Top Layer "NONET_L01_P035" (solid, pour order 35): -706.56,-102.36 -177.17,-102.36 -177.17,-101.97
GND on Top Layer "NONET_L01_P-001" (solid, pour order 127): 269.24,584.72 74.32,584.72 74.32,568.39 279.04,568.39 279.04,584.72
GND on Top Layer "NONET_L01_P-001" (solid, pour order 126): -84.3,584.72 -279.22,584.72 -279.22,568.39 -74.5,568.39 -74.5,584.72
GND on Top Layer "GND_L01_P111" (solid, pour order 111): 87.5,283 -87.5,283 -87.5,585 87.5,585
GND on Top Layer "GND_L01_P112" (solid, pour order 112): 342,581 342,283 262.5,283 262.5,581
GND on Top Layer "GND_L01_P113" (solid, pour order 113): -262.5,581 -262.5,283 -344,283 -344,581
GND on Top Layer "NONET_L01_P-001" (solid, pour order 125): 722.9,92.47 722.9,-102.45 706.56,-102.45 706.56,102.27 722.9,102.27
GND on Top Layer "NONET_L01_P-001" (solid, pour order 124): 83.83,-583.29 278.75,-583.29 278.75,-566.95 74.03,-566.95 74.03,-583.29
GND on Top Layer "NONET_L01_P-001" (solid, pour order 123): -269.72,-583.29 -74.79,-583.29 -74.79,-566.95 -279.52,-566.95 -279.52,-583.29
GND on Top Layer "NONET_L01_P-001" (solid, pour order 122): -722.9,92.47 -722.9,-102.45 -706.56,-102.45 -706.56,102.27 -722.9,102.27
GND on Top Layer "GND_L01_P105" (solid, pour order 105): -463,250 -463,-250 463,-250 463,250
GND on Top Layer "GND_L01_P104" (solid, pour order 104): 721,-102 721,-312.5 -721,-312.5 -721,-102 -600,-102
GND on Top Layer "GND_L01_P114" (solid, pour order 114): 287.5,333 287.5,308 -287.5,308 -287.5,333
GND on Top Layer "GND_L01_P110" (solid, pour order 110): -287.5,-333 -287.5,-308 287.5,-308 287.5,-333
GND on Top Layer "GND_L01_P109" (solid, pour order 109): 262.5,-581 262.5,-283 345,-283 345,-581
GND on Top Layer "GND_L01_P108" (solid, pour order 108): -344,-584 -344,-283 -262.5,-283 -262.5,-584
GND on Top Layer "GND_L01_P107" (solid, pour order 107): -87.5,-283 87.5,-283 87.5,-584 -87.5,-584
GND on Top Layer "GND_L01_P103" (solid, pour order 103): -721,100 -721,310.5 721,310.5 721,100 600,100
GND on Top Layer "GND_L01_P055" (solid, pour order 55): 160.93,324.29 137.4,324.29 137.4,399.25
GND on Top Layer "GND_L01_P054" (solid, pour order 54): 192.61,324.29 216.14,324.29 216.14,399.25
GND on Top Layer "GND_L01_P065" (solid, pour order 65): 192.59,-324.76 216.12,-324.76 216.12,-399.72
GND on Top Layer "GND_L01_P063" (solid, pour order 63): -160.95,-324.76 -137.43,-324.76 -137.43,-399.72
GND on Top Layer "GND_L01_P062" (solid, pour order 62): 160.9,-324.76 137.38,-324.76 137.38,-399.72
GND on Top Layer "GND_L01_P060" (solid, pour order 60): -192.64,-324.76 -216.17,-324.76 -216.17,-399.72
GND on Top Layer "GND_L01_P050" (solid, pour order 50): -192.61,324.29 -216.14,324.29 -216.14,399.25
GND on Top Layer "GND_L01_P049" (solid, pour order 49): -160.93,324.29 -137.4,324.29 -137.4,399.25
GND on Top Layer "GND_L01_P022" (solid, pour order 22): 462.46,15.84 462.46,39.37 537.43,39.37
GND on Top Layer "GND_L01_P023" (solid, pour order 23): 462.46,-15.84 462.46,-39.37 537.43,-39.37
GND on Top Layer "GND_L01_P026" (solid, pour order 26): -462.46,-15.84 -462.46,-39.37 -537.43,-39.37
GND on Top Layer "GND_L01_P027" (solid, pour order 27): -462.46,15.84 -462.46,39.37 -537.43,39.37
GND on Bottom Layer "GND_L04_P087" (solid, pour order 87): -721,309.12 -721,-312.5 721,-312.5 721,310.5
GND on Bottom Layer "GND_L04_P089" (solid, pour order 89): -342,-584 -342,-312.5 342,-312.5 342,-584
GND on Bottom Layer "GND_L04_P088" (solid, pour order 88): -344,582 -344,309.12 342,309.12 342,582
sig_5 on Bottom Layer "SIG_5_L04_P058" (solid, pour order 58): -167.05,-222.47 -167.05,-211.47 -172.4,-197.97 -172.35,-177.17 -181.2,-177.17 -181.2,-197.97 -186.55,-211.47 -186.55,-222.47
sig_6 on Bottom Layer "SIG_6_L04_P056" (solid, pour order 56): 186.5,-222.47 186.5,-211.47 181.15,-197.97 181.2,-177.17 172.35,-177.17 172.35,-197.97 167,-211.47 167,-222.47
sig_4 on Bottom Layer "SIG_4_L04_P051" (solid, pour order 51): 167.02,222 167.02,211 172.37,197.5 172.32,176.7 181.17,176.7 181.17,197.5 186.52,211 186.52,222
sig_3 on Bottom Layer "SIG_3_L04_P046" (solid, pour order 46): -186.52,222 -186.52,211 -181.17,197.5 -181.22,176.7 -172.37,176.7 -172.37,197.5 -167.02,211 -167.02,222
sig_1 on Bottom Layer "SIG_1_L04_P025" (solid, pour order 25): -222,-9.75 -211,-9.75 -197.5,-4.4 -176.7,-4.45 -176.7,4.4 -197.5,4.4 -211,9.75 -222,9.75
sig_2 on Bottom Layer "SIG_2_L04_P021" (solid, pour order 21): 222,9.75 211,9.75 197.5,4.4 176.7,4.45 176.7,-4.4 197.5,-4.4 211,-9.75 222,-9.75
no net on Top Solder "NONET_L01_P-001" (solid): 136.93,397.83 136.93,321.23 160.95,321.23 160.95,325.18
no net on Top Solder "NONET_L01_P-001" (solid): 215.67,397.82 215.67,321.22 191.65,321.22 191.65,325.17
no net on Top Solder "NONET_L01_P-001" (solid): 74.05,368.06 136.93,368.06 136.93,321.23 74.34,321.23 74.34,368.07
no net on Top Solder "NONET_L01_P-001" (solid): 215.38,368.06 278.25,368.06 278.25,321.22 215.67,321.22 215.67,368.06
no net on Top Solder "NONET_L01_P-001" (solid): -216.61,397.83 -216.61,321.23 -192.59,321.23 -192.59,325.18
no net on Top Solder "NONET_L01_P-001" (solid): -137.87,397.82 -137.87,321.22 -161.9,321.22 -161.9,325.17
no net on Top Solder "NONET_L01_P-001" (solid): -279.49,368.06 -216.61,368.06 -216.61,321.23 -279.2,321.23 -279.2,368.07
no net on Top Solder "NONET_L01_P-001" (solid): -138.16,368.06 -75.29,368.06 -75.29,321.22 -137.87,321.22 -137.87,368.06
no net on Top Solder "NONET_L01_P-001" (solid): -65.21,311.5 64.32,311.5 64.32,573 -65.21,573
GND on Top Solder "NONET_L01_P-001" (solid): 288.51,308 342,308 342,584 288.51,584
no net on Top Solder "NONET_L01_P-001" (solid): -288.52,308 -342,308 -342,584 -288.52,584
no net on Top Solder "NONET_L01_P-001" (solid): -288.52,-308 -342,-308 -342,-584 -288.52,-584
no net on Top Solder "NONET_L01_P-001" (solid): 288.51,-308 342,-308 342,-584 288.51,-584
no net on Top Solder "NONET_L01_P-001" (solid): -65.21,-311.5 64.32,-311.5 64.32,-573 -65.21,-573
no net on Top Solder "NONET_L01_P-001" (solid): -138.16,-368.06 -75.29,-368.06 -75.29,-321.22 -137.87,-321.22 -137.87,-368.06
no net on Top Solder "NONET_L01_P-001" (solid): -279.49,-368.06 -216.61,-368.06 -216.61,-321.23 -279.2,-321.23 -279.2,-368.07
no net on Top Solder "NONET_L01_P-001" (solid): -137.87,-397.82 -137.87,-321.22 -161.9,-321.22 -161.9,-325.17
no net on Top Solder "NONET_L01_P-001" (solid): -216.61,-397.83 -216.61,-321.23 -192.59,-321.23 -192.59,-325.18
no net on Top Solder "NONET_L01_P-001" (solid): 215.38,-368.06 278.25,-368.06 278.25,-321.22 215.67,-321.22 215.67,-368.06
no net on Top Solder "NONET_L01_P-001" (solid): 74.05,-368.06 136.93,-368.06 136.93,-321.23 74.34,-321.23 74.34,-368.07
no net on Top Solder "NONET_L01_P-001" (solid): 215.67,-397.82 215.67,-321.22 191.65,-321.22 191.65,-325.17
no net on Top Solder "NONET_L01_P-001" (solid): 136.93,-397.83 136.93,-321.23 160.95,-321.23 160.95,-325.18
no net on Top Solder "NONET_L01_P-001" (solid): 505.76,38.63 505.76,101.51 458.93,101.51 458.93,38.92 505.77,38.92
no net on Top Solder "NONET_L01_P-001" (solid): 505.77,-102.69 505.77,-39.82 458.94,-39.82 458.94,-102.4 505.78,-102.4
no net on Top Solder "NONET_L01_P-001" (solid): 535.53,38.92 458.92,38.92 458.92,14.9 462.88,14.9
no net on Top Solder "NONET_L01_P-001" (solid): 535.54,-39.82 458.93,-39.82 458.93,-15.79 462.89,-15.79
no net on Top Solder "NONET_L01_P-001" (solid): -535.54,-38.92 -458.93,-38.92 -458.93,-14.9 -462.89,-14.9
no net on Top Solder "NONET_L01_P-001" (solid): -535.52,39.82 -458.92,39.82 -458.92,15.79 -462.87,15.79
no net on Top Solder "NONET_L01_P-001" (solid): -535.53,39.82 -458.92,39.82 -458.92,15.79 -462.88,15.79
no net on Top Solder "GND_L01_P039" (solid): -721,-311.5 -721,-113 721,-113 721,-311.5
no net on Top Solder "NONET_L01_P-001" (solid): -505.77,-101.8 -505.77,-38.92 -458.94,-38.92 -458.94,-101.51 -505.78,-101.51
no net on Top Solder "NONET_L01_P-001" (solid): -505.76,39.53 -505.76,102.4 -458.93,102.4 -458.93,39.82 -505.77,39.82
GND on Top Solder "GND_L02_P099" (solid, pour order 99): -448,309.38 -448,-312.5 449,-312.5 449,310.24
no net on Top Solder "GND_L01_P039" (solid): -721,114 -721,312.5 721,312.5 721,114
no net on Top Solder "GND_L01_P040" (solid): -177.17,96.85 -177.17,-85.43 177.17,-85.43 177.17,96.85
GND on Mid-Layer 2 "GND_L03_P130" (solid, pour order 130): -344,-584 -344,-312.5 342,-312.5 342,-584
GND on Mid-Layer 2 "GND_L03_P129" (solid, pour order 129): -344,582 -344,309.12 342,309.12 342,582
GND on Mid-Layer 2 "GND_L03_P128" (solid, pour order 128): -721,309.12 -721,-312.5 721,-312.5 721,310.5
GND on Mid-Layer 1 "GND_L02_P118" (solid, pour order 118): -721,309.12 -721,-312.5 721,-312.5 721,310.5
GND on Mid-Layer 1 "GND_L02_P120" (solid, pour order 120): -344,-584 -344,-312.5 342,-312.5 342,-584
GND on Mid-Layer 1 "GND_L02_P119" (solid, pour order 119): -344,582 -344,309.12 342,309.12 342,582
GND on Bottom Solder "GND_L03_P098" (solid, pour order 98): -344,-584 -344,-312.5 342,-312.5 342,-584
GND on Bottom Solder "GND_L03_P097" (solid, pour order 97): -344,582 -344,309.12 342,309.12 342,582
GND on Bottom Solder "GND_L03_P096" (solid, pour order 96): -721,309.12 -721,-312.5 721,-312.5 721,310.5

## Keep-outs
Keep-Out Layer:
  lines w10: 342,310.5 721,310.5 ; 342,310.5 342,582 -344,582 -344,310.5 -721,310.5 -721,-311.5 -344,-311.5 -344,-584 342,-584 342,-312.5 345,-312.5 721,-312.5 721,310.5 ; 342,310.5 721,310.5

## Silkscreen, mask and mechanical layers (free items; w line width, h text height)
Mechanical 1:
  drawing of 364 lines, arcs and shapes, not listed
  text "Layer" at -648,2495 h60
  text "Name" at -238.09,2495 h60
  text "Material" at 691.66,2495 h60
  text "Thickness" at 1291.51,2495 h60
  text "Constant" at 1941.34,2495 h60
  text "Board Layer Stack" at 2511.2,2495 h60
  text "Top Overlay" at -238.09,2375 h60
  text "Top Solder" at -238.09,2255 h60
  text "SM-001" at 691.66,2255 h60
  text "1.00mil" at 1291.51,2255 h60
  text "4" at 1941.34,2255 h60
  text "1" at -648,2135 h60
  text "Top Layer" at -238.09,2135 h60
  text "CF-004" at 691.66,2135 h60
  text "1.38mil" at 1291.51,2135 h60
  text "Core1" at -238.09,2015 h60
  text "RO4350B" at 691.66,2015 h60
  text "10.00mil" at 1291.51,2015 h60
  text "3.48" at 1941.34,2015 h60
  text "2" at -648,1895 h60
  text "Mid-Layer 1" at -238.09,1895 h60
  text "CF-004" at 691.66,1895 h60
  text "1.38mil" at 1291.51,1895 h60
  text "Dielectric 1" at -238.09,1775 h60
  text "PR7628" at 691.66,1775 h60
  text "7.00mil" at 1291.51,1775 h60
  text "4.24" at 1941.34,1775 h60
  text "Dielectric 2" at -238.09,1655 h60
  text "PR2116" at 691.66,1655 h60
  text "4.00mil" at 1291.51,1655 h60
  text "4.17" at 1941.34,1655 h60
  text "Dielectric 3" at -238.09,1535 h60
  text "PR7628" at 691.66,1535 h60
  text "7.00mil" at 1291.51,1535 h60
  text "4.24" at 1941.34,1535 h60
  text "3" at -648,1415 h60
  text "Mid-Layer 2" at -238.09,1415 h60
  text "CF-004" at 691.66,1415 h60
  text "1.38mil" at 1291.51,1415 h60
  text "Core2" at -238.09,1295 h60
  text "RO-4350B" at 691.66,1295 h60
  text "10.00mil" at 1291.51,1295 h60
  text "3.48" at 1941.34,1295 h60
  text "4" at -648,1175 h60
  text "Bottom Layer" at -238.09,1175 h60
  text "CF-004" at 691.66,1175 h60
  text "1.38mil" at 1291.51,1175 h60
  text "Bottom Solder" at -238.09,1055 h60
  text "SM-001" at 691.66,1055 h60
  text "1.00mil" at 1291.51,1055 h60
  text "4" at 1941.34,1055 h60
  text "Bottom Overlay" at -238.09,935 h60